# Altium PCB PCBGOST.PcbDoc (part 3 of 3)
Units mm, origin at the board's own origin, x right, y up, seen from the top; angles counter-clockwise.
Board outline 200 x 200 mm, 2 copper layers (Top Layer, Bottom Layer), stack 1.64 mm thick; 237 components, 177 nets, 928 pads, 315 vias.
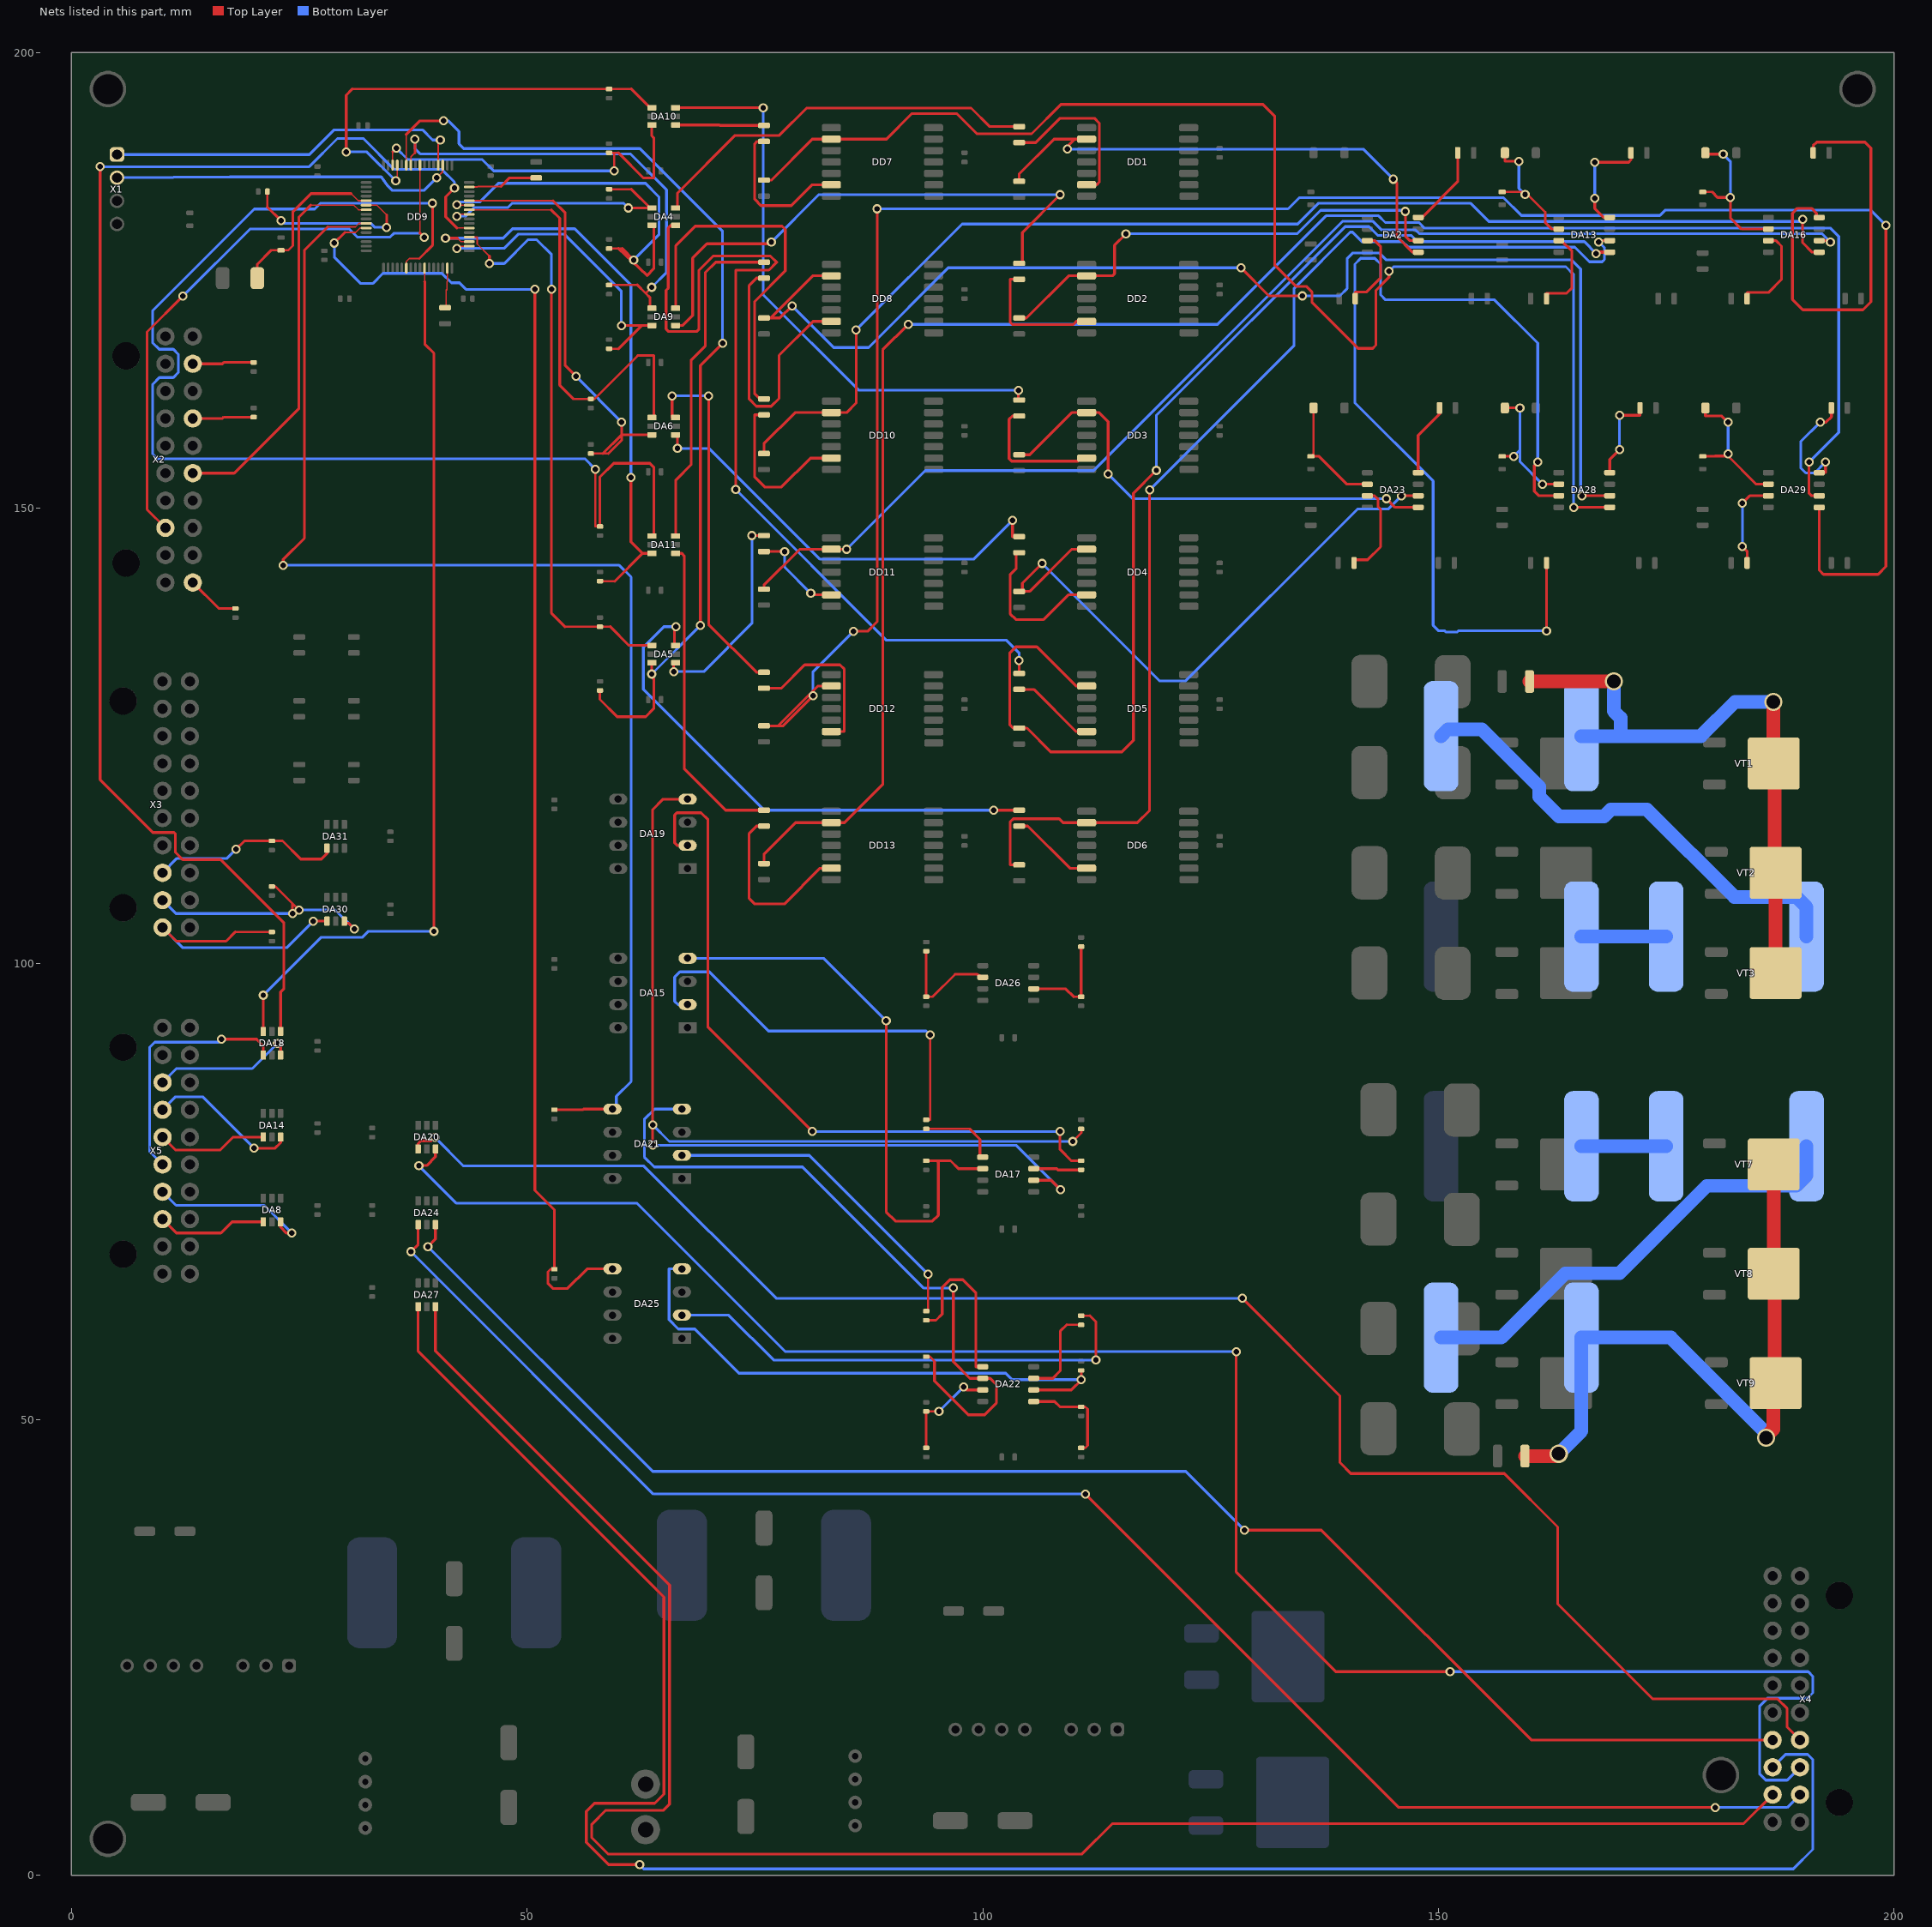
[diagram p3: the nets of this part, all layers, seen from the top]

## Via types
v1: diameter 1, hole 0.6, Top Layer to Bottom Layer, 272 vias
v2: diameter 2, hole 1.5, Top Layer to Bottom Layer, 41 vias
v3: diameter 0.5, hole 0.3, Top Layer to Bottom Layer, 2 vias

## Nets (pads, with @x,y where several pads share a name; then routed paths per layer and width w, separated by ;. In a path a pad name is that pad's centre, name@x,y a point inside that pad or via, vN(x,y) a via of type N, cw(c..) or ccw(c..) an arc to the next point about the centre after c; other vN are vias at no path point) (continued)
NetC35_1: C35.1 DA13.2 VD2.C | length 15.3
  Top Layer w0.25: C35.1@157,184.7 159.241,184.7 159.512,184.7 161.722,182.49
  Top Layer w0.3: VD2.C@157.3,189 157.3,188.062 v1(158.843,188.062) ; v1@159.241,184.7 v1(159.512,184.429) ; 161.722,182.49 161.722,181.356 162.443,180.635 DA13.2@163.206,180.635
  Bottom Layer w0.3: v1(158.843,188.062) 158.843,185.098 v1(159.512,184.429)
NetC41_1: C41.1 DA16.2 VD5.C | length 17.4
  Top Layer w0.25: C41.1@179,184.7 180.035,184.7
  Top Layer w0.3: VD5.C@179.3,189 179.3,188.849 v1(181.254,188.849) ; 180.035,184.7 180.636,184.099 v1(182.042,184.099) 182.042,181.864 183.271,180.635 DA16.2@186.206,180.635
  Bottom Layer w0.3: v1(181.254,188.849) 182.042,188.062 v1(182.042,184.099)
NetC42_1: C42.1 L3.2 VT1.D VT2.D VT3.D | length 68
  Top Layer w1.5: C42.1@160,131 v2(169.25,131) ; v2(186.75,128.75) 186.75,122.05 VT1.D@186.8,122 186.9,121.9 186.9,110.1 VT2.D@187,110 VT3.D@187,99
  Bottom Layer w1.5: L3.2@165.7,125 170,125 ; v2(169.25,131) 169.25,127.75 170,127 170,125 ; v2(186.75,128.75) 182.546,128.75 178.796,125 170,125
NetC45_1: C45.1 DA23.2 VD6.C | length 12.9
  Top Layer w0.25: VD6.C@136.3,161 136.3,156 C45.1@136,155.7 136.906,155.7
  Top Layer w0.3: 136.906,155.7 139.971,152.635 DA23.2@142.206,152.635
NetC47_1: C47.1 L6.2 VT7.D VT8.D VT9.D | length 73.2
  Top Layer w1.5: C47.1@159.5,46 162.815,46 163.065,46.25 v2(163.2,46.25) ; v2(185.95,48) 185.95,48.135 186.75,48.935 186.75,53.75 VT9.D@187,54 186.9,54.1 186.9,65.9 VT8.D@186.8,66 VT7.D@186.8,78
  Bottom Layer w1.5: v2(163.2,46.25) 165.7,48.75 L6.2@165.7,59 175.5,59 180.442,54.059 185.854,48.646 185.854,48.096 v2(185.95,48)
NetC48_1: C48.1 DA28.2 VD7.C | length 15.1
  Top Layer w0.25: C48.1@157,155.7 v1(158.267,155.7)
  Top Layer w0.3: VD7.C@157.3,161 157.3,161.011 v1(158.953,161.011) ; v1(161.436,152.635) DA28.2@163.206,152.635
  Bottom Layer w0.3: v1(158.267,155.7) 158.953,156.386 ; v1(158.953,161.011) 158.953,156.386 ; v1(161.436,152.635) 158.953,155.118 158.953,156.386
NetC51_1: C51.1 DA29.2 VD8.C | length 18.6
  Top Layer w0.25: v1@181.532,155.7 C51.1@179,155.7 181.66,155.828 184.853,152.635
  Top Layer w0.3: VD8.C@179.3,161 179.3,160.122 181.102,160.122 v1(181.788,159.436) ; v1@181.532,155.7 181.66,155.828 v1(181.788,155.956) ; 184.853,152.635 DA29.2@186.206,152.635
  Bottom Layer w0.3: v1(181.788,155.956) v1(181.788,159.436)
NetDA2_3: DA2.3 R40.2 | length 9.3
  Top Layer w0.3: R40.2@140.875,173 140.875,173.739 142.133,173.739 143.654,175.26 143.654,178.738 143.027,179.365 DA2.3@142.206,179.365
NetDA2_8: DA2.8 R41.2 | length 9.1
  Top Layer w0.3: DA2.8@147.794,181.905 148.198,181.905 152.125,185.832 R41.2@152.125,189
NetDA13_3: DA13.3 R46.2 | length 9.6
  Top Layer w0.3: R46.2@161.875,173 161.875,173.596 164.084,173.596 164.654,174.166 164.654,178.211 163.5,179.365 DA13.3@163.206,179.365
NetDA13_8: DA13.8 R47.2 | length 12
  Top Layer w0.3: v1(167.157,184.023) 167.157,182.896 168.148,181.905 DA13.8@168.794,181.905 ; v1(167.157,187.96) 170.871,187.96 171.125,188.214 R47.2@171.125,189
  Bottom Layer w0.3: v1(167.157,184.023) v1(167.157,187.96)
NetDA15_2: DA15.2 R50.1 | length 45.1
  Top Layer w0.25: R50.1@93.8,82.9 94.234,82.9 v1(94.234,92.202)
  Bottom Layer w0.3: DA15.2@67.62,95.54 66.548,95.54 66.192,95.896 66.192,98.552 66.777,99.136 70.002,99.136 76.495,92.643 93.793,92.643 v1(94.234,92.202)
NetDA15_4: DA15.4 DA17.2 R55.2 | length 64.6
  Top Layer w0.25: R55.2@93.8,78.4 94.945,78.4
  Top Layer w0.3: v1(89.408,93.751) 89.408,72.796 90.424,71.78 94.488,71.78 95.123,72.415 95.123,78.222 94.945,78.4 96.469,78.4 97.334,77.535 DA17.2@100.006,77.535
  Bottom Layer w0.3: DA15.4@67.62,100.62 82.539,100.62 v1(89.408,93.751)
NetDA16_3: DA16.3 R51.2 | length 10.4
  Top Layer w0.3: R51.2@183.875,173 183.875,173.669 186.215,173.669 187.654,175.108 187.654,178.757 187.046,179.365 DA16.3@186.206,179.365
NetDA16_8: DA16.8 R53.2 | length 47.2
  Top Layer w0.3: R53.2@191.125,189 191.125,189.779 191.516,190.17 196.799,190.17 197.46,189.509 197.46,172.644 196.596,171.78 189.992,171.78 188.854,172.918 188.854,182.372 189.387,182.905 190.957,182.905 191.491,182.372 191.491,181.905 DA16.8@191.794,181.905
NetDA17_1: DA17.1 R50.2 | length 8.6
  Top Layer w0.25: R50.2@93.8,81.9 98.552,81.9
  Top Layer w0.3: 98.552,81.9 99.695,80.757 99.695,78.805 DA17.1@100.006,78.805
NetDA17_6: DA17.6 DA19.4 R64.2 | length 139.9
  Top Layer w0.25: v1(109.88,80.518) 110.82,81.458 R64.2@110.8,81.9
  Top Layer w0.3: v1(63.779,80.112) v1(63.779,82.347) 63.779,116.937 64.922,118.08 DA19.4@67.62,118.08 ; DA17.6@105.594,76.265 107.504,76.265 v1(108.534,75.235)
  Bottom Layer w0.3: v1(63.779,80.112) 103.657,80.112 v1(108.534,75.235) ; v1(63.779,82.347) 65.608,80.518 v1(109.88,80.518)
NetDA17_7: DA17.7 R57.2 | length 5.3
  Top Layer w0.3: DA17.7@105.594,77.535 108.128,77.535 108.263,77.4 R57.2@110.8,77.4
NetDA19_2: DA19.2 R57.1 | length 79.6
  Top Layer w0.25: 109.728,78.4 R57.1@110.8,78.4
  Top Layer w0.3: DA19.2@67.62,113 66.476,113 66.192,113.284 66.192,116.332 66.446,116.586 69.088,116.586 69.85,115.824 69.85,93.066 v1(81.305,81.61) ; v1(108.483,81.61) 108.483,79.645 109.728,78.4
  Bottom Layer w0.3: v1(81.305,81.61) v1(108.483,81.61)
NetDA21_2: DA21.2 R67.1 | length 36.7
  Top Layer w0.25: R67.1@93.8,61.9 94.005,61.9 v1(94.005,65.964)
  Bottom Layer w0.3: DA21.2@67,79 80.969,79 v1(94.005,65.964)
NetDA21_4: DA21.4 DA22.2 R70.2 | length 76.6
  Top Layer w0.25: R70.2@93.8,56.9 94.205,56.9 94.713,56.392
  Top Layer w0.3: 94.713,56.392 94.713,54.233 98.425,50.521 100.203,50.521 101.498,51.816 101.498,53.848 100.811,54.535 DA22.2@100.006,54.535 98.59,54.535 96.774,56.351 v1(96.774,64.44)
  Bottom Layer w0.3: DA21.4@67,84.08 64.008,84.08 62.865,82.937 62.865,78.816 63.957,77.724 80.213,77.724 93.497,64.44 v1(96.774,64.44)
NetDA22_1: DA22.1 R67.2 | length 18.5
  Top Layer w0.25: R67.2@93.8,60.9 94.869,60.9
  Top Layer w0.3: 94.869,60.9 95.555,61.586 95.555,64.516 96.393,65.354 97.815,65.354 99.237,63.933 99.237,55.805 DA22.1@100.006,55.805
NetDA22_3: DA22.3 R65.1 R69.1 | length 11.5
  Top Layer w0.25: R69.1@93.8,50.9 v1(95.198,50.9)
  Top Layer w0.3: R65.1@93.8,46.9 R69.1@93.8,50.9 ; v1(97.892,53.594) 98.221,53.265 DA22.3@100.006,53.265
  Bottom Layer w0.3: v1(95.198,50.9) v1(97.892,53.594)
NetDA22_5: DA22.5 R74.1 R76.1 | length 11.1
  Top Layer w0.25: R76.1@110.8,46.9 111.252,46.9 111.506,47.154 ; R74.1@110.8,51.4 111.252,51.4 111.506,51.146
  Top Layer w0.3: DA22.5@105.594,51.995 107.899,51.995 108.494,51.4 R74.1@110.8,51.4 ; 111.506,47.154 111.506,51.146
NetDA22_6: DA22.6 DA25.4 R78.2 | length 62.7
  Top Layer w0.25: v1(110.8,54.381) R78.2@110.8,55.4 110.82,55.4 v1@110.82,54.357
  Top Layer w0.3: DA22.6@105.594,53.265 109.728,53.265 v1@110.82,54.357
  Bottom Layer w0.3: DA25.4@67,66.54 65.583,66.54 65.583,60.96 66.599,59.944 68.402,59.944 73.254,55.093 102.514,55.093 103.226,54.381 v1(110.8,54.381)
NetDA22_7: DA22.7 R75.2 | length 10.2
  Top Layer w0.25: 109.22,60.4 R75.2@110.8,60.4
  Top Layer w0.3: DA22.7@105.594,54.535 107.696,54.535 108.509,55.348 108.509,59.689 109.22,60.4
NetDA23_3: DA23.3 R68.2 | length 10.5
  Top Layer w0.3: R68.2@140.75,144 140.75,144.348 142.24,144.348 143.662,145.771 143.662,149.881 143.393,150.15 143.393,150.974 143.002,151.365 DA23.3@142.206,151.365
NetDA23_8: DA23.8 R71.2 | length 8.1
  Top Layer w0.3: DA23.8@147.794,153.905 147.777,153.905 147.777,157.988 150.125,160.336 R71.2@150.125,161
NetDA25_2: DA25.2 R75.1 | length 53.6
  Top Layer w0.25: R75.1@110.8,61.4 111.76,61.4
  Top Layer w0.3: 111.76,61.4 112.42,60.74 v1(112.42,56.54)
  Bottom Layer w0.3: DA25.2@67,61.46 72.136,61.46 77.056,56.54 v1(112.42,56.54)
NetDA26_2: DA26.2 R80.2 R82.2 | length 12.3
  Top Layer w0.25: R82.2@93.8,96.4 94.488,96.4 96.97,98.882
  Top Layer w0.3: R82.2@93.8,96.4 R80.2@93.8,101.4 ; 96.97,98.882 99.348,98.882 DA26.2@100.006,98.535
NetDA26_6: DA26.6 R92.2 R94.2 | length 11.1
  Top Layer w0.25: 109.983,96.4 R94.2@110.8,96.4
  Top Layer w0.3: DA26.6@105.594,97.265 109.118,97.265 109.983,96.4 ; R94.2@110.8,96.4 R92.2@110.8,101.9
NetDA28_3: DA28.3 R81.2 | length 108.9
  Top Layer w0.3: v1(160.909,155.067) 160.528,154.686 160.528,151.873 161.036,151.365 DA28.3@163.206,151.365 ; v1(161.874,136.55) R81.2@161.875,144
  Bottom Layer w0.3: v1(160.909,155.067) 160.909,168.123 156.159,172.872 144.196,172.872 143.662,173.406 143.662,176.784 143.027,177.419 141.478,177.419 140.843,176.784 140.843,161.569 149.428,152.984 149.428,137.16 150.038,136.55 150.713,136.55 150.862,136.402 152.025,136.402 152.174,136.55 v1(161.874,136.55)
NetDA28_8: DA28.8 R88.2 | length 9.8
  Top Layer w0.3: DA28.8@168.794,153.905 168.808,153.905 168.808,155.372 v1(169.875,156.439) ; v1(169.875,160.198) 172.125,160.198 R88.2@172.125,161
  Bottom Layer w0.3: v1(169.875,156.439) v1(169.875,160.198)
NetDA29_3: DA29.3 R100.2 | length 10
  Top Layer w0.3: v1(183.363,145.8) 183.875,145.288 R100.2@183.875,144 ; v1(183.363,150.571) 184.156,151.365 DA29.3@186.206,151.365
  Bottom Layer w0.3: v1(183.363,145.8) v1(183.363,150.571)
NetDA29_8: DA29.8 R102.2 | length 13.6
  Top Layer w0.3: DA29.8@191.794,153.905 192.481,153.905 v1(192.481,155.067) ; v1(191.897,159.436) 192.541,159.436 193.125,160.02 R102.2@193.125,161
  Bottom Layer w0.3: v1(191.897,159.436) 189.763,157.302 189.763,154.432 190.322,153.873 191.287,153.873 v1(192.481,155.067)
NetDD1_6: DD1.6 R5.1 | length 18.1
  Top Layer w0.3: R5.1@104,190.125 105.816,190.125 108.477,192.786 112.268,192.786 112.801,192.253 112.801,185.779 112.522,185.5 DD1.6@111.4,185.5
NetDD2_6: DD2.6 R6.1 | length 14.4
  Top Layer w0.3: R6.1@104,175.125 102.997,175.125 102.997,170.434 103.276,170.155 109.941,170.155 110.287,170.5 DD2.6@111.4,170.5
NetDD3_6: DD3.6 R7.1 | length 14.3
  Top Layer w0.3: R7.1@104,160.125 103.254,160.125 102.895,159.766 102.895,155.448 103.175,155.169 110.413,155.169 110.744,155.5 DD3.6@111.4,155.5
NetDD4_6: DD4.6 R8.1 | length 17.1
  Top Layer w0.3: R8.1@104,145.125 103.657,145.125 103.657,143.358 102.997,142.697 102.997,138.43 103.632,137.795 106.693,137.795 109.398,140.5 DD4.6@111.4,140.5
NetDD5_6: DD5.6 R18.1 | length 9.3
  Top Layer w0.3: R18.1@104,130.125 105.611,130.125 110.236,125.5 DD5.6@111.4,125.5
NetDD6_6: DD6.6 R19.1 | length 9.3
  Top Layer w0.3: R19.1@104,115.125 104.941,115.125 109.566,110.5 DD6.6@111.4,110.5
NetDD7_6: DD7.6 R20.1 | length 16.9
  Top Layer w0.3: R20.1@76,190.25 75.239,190.25 74.981,189.992 74.981,183.896 75.667,183.21 78.99,183.21 81.28,185.5 DD7.6@83.4,185.5
NetDD8_6: DD8.6 R21.1 | length 30.4
  Top Layer w0.3: R21.1@76,175.25 75.184,175.25 74.371,174.437 74.371,161.976 75.159,161.188 76.784,161.188 77.648,162.052 77.648,166.768 81.38,170.5 DD8.6@83.4,170.5
NetDD10_6: DD10.6 R32.1 | length 18
  Top Layer w0.3: R32.1@76,160.25 74.981,160.25 74.981,153.416 76.073,152.324 77.926,152.324 81.102,155.5 DD10.6@83.4,155.5
NetDD11_6: DD11.6 R33.1 | length 10.4
  Top Layer w0.3: R33.1@76,145.25 v1(78.267,145.25) ; v1(81.128,140.665) 81.293,140.5 DD11.6@83.4,140.5
  Bottom Layer w0.3: v1(78.267,145.25) 78.267,143.526 v1(81.128,140.665)
NetDD12_6: DD12.6 R34.1 | length 18.3
  Top Layer w0.3: R34.1@76,130.25 77.902,130.25 80.468,132.817 84.328,132.817 84.811,132.334 84.811,125.5 DD12.6@83.4,125.5
NetDD13_6: DD13.6 R35.1 | length 20
  Top Layer w0.3: R35.1@76,115.125 75.184,115.125 74.371,114.312 74.371,107.188 74.981,106.578 78.232,106.578 82.154,110.5 DD13.6@83.4,110.5
NetL3_1: L3.1 L4.1 | length 53
  Bottom Layer w1.5: L3.1@150.3,125 151.05,125.75 154.75,125.75 161.05,119.45 161.05,118.367 163.217,116.2 168.183,116.2 168.946,116.963 172.871,116.963 182.484,107.35 189.265,107.35 190.4,106.215 L4.1@190.4,103
NetL4_2: L4.2 L5.2 | length 9.3
  Bottom Layer w1.5: L5.2@165.7,103 L4.2@175,103
NetL6_1: L6.1 L7.1 | length 50.7
  Bottom Layer w1.5: L6.1@150.3,59 156.887,59 163.941,66.054 169.867,66.054 179.463,75.65 189.265,75.65 190.4,76.785 L7.1@190.4,80
NetL7_2: L7.2 L8.2 | length 9.3
  Bottom Layer w1.5: L8.2@165.7,80 L7.2@175,80
NetR39_2: R39.2 X2.11 | length 5.9
  Top Layer w0.25: 16.17,139 R39.2@18,139
  Top Layer w0.3: X2.11@13.32,141.85 16.17,139
NetR43_2: R43.2 X2.17 | length 6.7
  Top Layer w0.3: X2.17@13.32,159.85 16.561,159.85 16.711,160 R43.2@20,160
NetR44_2: R44.2 X2.19 | length 6.7
  Top Layer w0.3: X2.19@13.32,165.85 16.561,165.85 16.711,166 R44.2@20,166
nJTRST: DD9.56 X2.3 | length 66.2
  Top Layer w0.15: 38.25,180.19 DD9.56@38.25,187.65
  Top Layer w0.3: X2.3@10.32,147.85 8.306,149.864 8.306,169.348 v1(12.237,173.279) ; 38.25,180.19 v1(38.71,179.73)
  Bottom Layer w0.3: v1(12.237,173.279) 19.599,180.641 30.481,180.641 31.372,179.75 34.954,179.75 35.368,180.164 38.276,180.164 v1(38.71,179.73)
nRSTIN: DD9.7 X2.15 | length 43.7
  Top Layer w0.15: 26.262,183.252 30.988,183.252 31.49,182.75 DD9.7@32.35,182.75
  Top Layer w0.3: X2.15@13.32,153.85 17.858,153.85 24.965,160.957 24.965,181.955 26.262,183.252
OG1_1: DA2.5 DD1.2 R1.1 | length 57.9
  Top Layer w0.3: R1.1@104,185.875 103.988,185.875 103.988,186.665 107.823,190.5 110.109,190.5 ; v1(109.296,189.408) 109.296,189.687 110.109,190.5 ; DD1.2@111.4,190.5 110.109,190.5 ; v1(145.059,186.106) 145.454,185.711 145.454,179.809 147.168,178.095 DA2.5@147.794,178.095
  Bottom Layer w0.3: v1(109.296,189.408) 141.757,189.408 v1(145.059,186.106)
OG1_2: DA23.5 DD3.2 R3.1 | length 53.4
  Top Layer w0.3: R3.1@104,155.875 105.156,155.875 109.781,160.5 DD3.2@111.4,160.5 112.776,160.5 113.767,159.509 v1(113.767,153.746) ; v1(144.297,151.054) 145.256,150.095 DA23.5@147.794,150.095
  Bottom Layer w0.3: v1(113.767,153.746) 116.459,151.054 v1(144.297,151.054)
OG2_1: DA13.5 DD5.2 R12.1 | length 130
  Top Layer w0.3: DD5.2@111.4,130.5 110.236,130.5 105.938,134.798 103.632,134.798 102.972,134.137 102.972,126.238 103.335,125.875 R12.1@104,125.875 104.851,125.875 107.46,123.266 115.265,123.266 116.535,124.536 116.535,151.638 v1(119.05,154.153)
  Top Layer w0.4: v1(167.32,177.952) 167.462,178.095 DA13.5@168.794,178.095
  Bottom Layer w0.3: v1(119.05,154.153) 119.05,160.172 139.772,180.895 142.392,180.895 143.353,179.934 147.041,179.934 147.726,179.248 166.024,179.248 v1(167.32,177.952)
OG2_2: DA28.5 DD7.2 R14.1 | length 152.9
  Top Layer w0.3: R14.1@76,186 76.805,186 81.305,190.5 DD7.2@83.4,190.5 89.433,190.5 92.24,193.307 97.13,193.307 99.352,191.084 105.359,191.084 108.585,194.31 130.759,194.31 132.029,193.04 132.029,176.708 134.387,174.35 135.507,174.35 136.121,173.736 136.121,172.616 141.199,167.538 142.788,167.538 143.144,167.894 143.144,173.901 144.577,175.334 v1(144.577,175.997) ; v1(164.846,150.095) DA28.5@168.794,150.095
  Bottom Layer w0.3: v1(144.577,175.997) 145.085,176.505 163.982,176.505 164.846,175.641 v1(164.846,150.095)
OG3_1: DA16.5 DD10.2 R27.1 | length 136.4
  Top Layer w0.3: R27.1@76,156 75.997,156 75.997,157.099 79.398,160.5 DD10.2@83.4,160.5 85.062,160.5 86.106,161.544 v1(86.106,169.545) ; v1(189.967,181.686) 189.967,179.136 191.008,178.095 DA16.5@191.794,178.095
  Bottom Layer w0.3: v1(86.106,169.545) 97.739,181.178 134.569,181.178 136.87,183.479 153.503,183.479 155.524,181.458 189.738,181.458 v1(189.967,181.686)
OG3_2: DA29.5 DD12.2 R29.1 | length 236.8
  Top Layer w0.3: R29.1@76,126.125 77.56,126.125 ; v1(81.382,129.413) 78.094,126.125 77.56,126.125 ; DD12.2@83.4,130.5 81.935,130.5 77.56,126.125 ; v1(85.801,136.5) 87.376,136.5 88.417,137.541 v1(88.417,182.855) ; DA29.5@191.794,150.095 191.794,143.205 192.251,142.748 198.247,142.748 199.111,143.612 v1(199.111,181.051)
  Bottom Layer w0.3: v1(81.382,129.413) 81.382,132.08 v1(85.801,136.5) ; v1(88.417,182.855) 133.512,182.855 134.736,184.079 157.152,184.079 159.1,182.131 174.296,182.131 174.872,182.707 197.455,182.707 v1(199.111,181.051)
OG4_1: DA2.6 DD2.2 R2.1 | length 53.5
  Top Layer w0.3: R2.1@104,170.875 104.8,170.875 109.425,175.5 DD2.2@111.4,175.5 114.224,175.5 114.466,175.742 114.466,178.86 v1(115.717,180.111) ; v1(146.38,182.575) 146.38,179.857 146.873,179.365 DA2.6@147.794,179.365
  Bottom Layer w0.3: v1(115.717,180.111) 134.489,180.111 137.072,182.695 146.261,182.695 v1(146.38,182.575)
OG4_2: DA23.6 DD4.2 R4.1 | length 68.3
  Top Layer w0.3: R4.1@104,140.875 R4.1@104.343,140.875 ; v1(106.502,143.942) 104.343,141.783 R4.1@104.343,140.875 ; DD4.2@111.4,145.5 109.762,145.5 105.137,140.875 R4.1@104.343,140.875 ; v1(145.948,151.365) DA23.6@147.794,151.365
  Bottom Layer w0.3: v1(106.502,143.942) 119.38,131.064 122.276,131.064 141.122,149.911 144.494,149.911 v1(145.948,151.365)
OG5_1: DA13.6 DD6.2 R13.1 | length 127.3
  Top Layer w0.3: R13.1@104,110.875 102.997,110.875 102.997,115.57 103.353,115.926 108.388,115.926 108.814,115.5 DD6.2@111.4,115.5 116.973,115.5 118.313,116.84 v1(118.313,152.019) ; v1(167.589,179.222) 167.732,179.365 DA13.6@168.794,179.365
  Bottom Layer w0.3: v1(118.313,152.019) 134.168,167.874 134.168,174.137 140.325,180.295 140.573,180.295 141.61,179.258 146.062,179.258 146.682,178.638 164.973,178.638 166.573,177.038 167.97,177.038 168.224,177.292 168.224,178.587 v1(167.589,179.222)
OG5_2: DA28.6 DD8.2 R15.1 | length 138.1
  Top Layer w0.3: R15.1@76,170.875 76.717,170.875 ; v1(79.07,172.212) 77.733,170.875 76.717,170.875 ; DD8.2@83.4,175.5 81.342,175.5 76.717,170.875 ; v1(128.346,176.378) 131.42,173.304 v1(135.077,173.304) ; v1(165.76,151.365) DA28.6@168.794,151.365
  Bottom Layer w0.3: v1(79.07,172.212) 83.642,167.64 87.482,167.64 96.22,176.378 v1(128.346,176.378) ; v1(135.077,173.304) 139.192,173.304 139.979,174.092 139.979,177.384 140.614,178.019 143.494,178.019 144.247,177.267 164.582,177.267 165.608,176.24 165.608,151.517 v1(165.76,151.365)
OG6_1: DA16.6 DD11.2 R28.1 | length 136.2
  Top Layer w0.3: R28.1@76,141.125 75.997,141.125 75.997,141.569 79.928,145.5 DD11.2@83.4,145.5 v1(85.065,145.5) ; DA16.6@191.794,179.365 192.872,179.365 v1(193.015,179.222)
  Bottom Layer w0.3: v1(85.065,145.5) 93.692,154.127 112.156,154.127 139.523,181.495 142.803,181.495 143.764,180.534 147.497,180.534 147.904,180.126 192.111,180.126 v1(193.015,179.222)
OG6_2: DA29.6 DD13.2 R30.1 | length 207.6
  Top Layer w0.3: R30.1@76,111 75.997,111 75.997,112.039 79.457,115.5 DD13.2@83.4,115.5 84.836,115.5 89.027,119.691 89.027,167.386 v1(91.821,170.18) ; v1(190.678,155.067) 190.678,151.638 190.951,151.365 DA29.6@191.794,151.365
  Bottom Layer w0.3: v1(91.821,170.18) 125.758,170.18 137.672,182.095 143.432,182.095 144.177,181.35 147.878,181.35 148.501,180.726 193.035,180.726 193.929,179.832 193.929,158.318 v1(190.678,155.067)
OSC_IN: C11.1 DD9.5 ZQ1.1 | length 19.2
  Top Layer w0.15: 30.69,184.531 31.471,183.75 DD9.5@32.35,183.75
  Top Layer w0.25: 21.916,178.3 C11.1@23,178.3 23.792,178.3 24.308,178.816
  Top Layer w0.3: ZQ1.1@20.4,175.25 20.4,176.784 21.916,178.3 ; 24.308,178.816 24.308,182.55 26.289,184.531 30.69,184.531
OSC_OUT: DD9.6 R37.2 | length 19.8
  Top Layer w0.15: DD9.6@32.35,183.25 33.528,183.25 34.595,182.183
  Top Layer w0.25: 21.5,183.046 R37.2@21.5,184.75
  Top Layer w0.3: 21.5,183.046 v1(22.987,181.559) ; v1(34.595,180.823) 34.595,182.183
  Bottom Layer w0.3: v1(22.987,181.559) 23.305,181.241 32.881,181.241 33.299,180.823 v1(34.595,180.823)
R1: DA18.6 DD9.26 | length 98.8
  Top Layer w0.15: 38.75,174.864 DD9.26@38.75,176.35
  Top Layer w0.3: DA18.6@21.05,92.6 21.05,96.564 v1(21.057,96.571) ; 38.75,174.864 38.775,174.839 38.775,168.006 39.776,167.005 v1(39.776,103.581)
  Bottom Layer w0.3: v1(21.057,96.571) 27.417,102.931 31.943,102.931 32.593,103.581 v1(39.776,103.581)
R2: DA18.4 DD9.38 | length 156.6
  Top Layer w0.15: 42.287,180.75 DD9.38@43.65,180.75
  Top Layer w0.3: v1(3.15,187.477) 3.15,120.218 8.941,114.427 11.252,114.427 11.405,114.275 11.405,112.243 12.192,111.455 16.358,111.455 23.317,104.496 23.317,97.282 22.95,96.915 DA18.4@22.95,92.6 ; v1(42.037,185.141) 41.072,184.175 41.072,181.966 42.287,180.75
  Bottom Layer w0.3: v1(3.15,187.477) 26.096,187.477 29.187,190.568 32.047,190.568 35.443,187.173 40.64,187.173 42.037,185.776 v1(42.037,185.141)
U1: DA21.5 DD9.10 R72.1 | length 148.1
  Top Layer w0.15: 28.13,180.873 31.166,180.873 31.542,181.25 DD9.10@32.35,181.25
  Top Layer w0.3: v1(23.241,143.744) 23.241,144.386 25.565,146.71 25.565,178.308 28.13,180.873 ; R72.1@53,84 56.134,84 56.214,84.08 DA21.5@59.38,84.08
  Bottom Layer w0.3: v1(23.241,143.744) 60.117,143.744 61.417,142.443 61.417,87.097 59.792,85.471 59.792,84.08 DA21.5@59.38,84.08
U2: DA25.5 DD9.11 R77.1 | length 148.8
  Top Layer w0.15: 30.023,180.264 31.193,180.264 31.679,180.75 DD9.11@32.35,180.75
  Top Layer w0.25: 52.299,66.221 52.578,66.5 R77.1@53,66.5 53,73.009
  Top Layer w0.3: v1(28.854,179.095) 30.023,180.264 ; v1(50.851,174.021) 50.851,75.159 53,73.009 ; 52.299,66.221 52.299,64.922 52.832,64.389 54.432,64.389 56.583,66.54 DA25.5@59.38,66.54
  Bottom Layer w0.3: v1(28.854,179.095) 28.854,177.548 31.748,174.655 33.059,174.655 34.177,175.773 40.662,175.773 41.705,174.731 42.583,174.731 43.293,174.021 v1(50.851,174.021)
UART_RX: DD9.52 X1.1 | length 39.9
  Top Layer w0.15: DD9.52@40.25,187.65 v1@40.25,190.161
  Top Layer w0.3: v1@40.25,190.161 v1(40.488,190.398)
  Bottom Layer w0.3: X1.1@5,188.81 26.115,188.81 28.827,191.521 38.514,191.521 39.637,190.398 v1(40.488,190.398)
UART_TX: DD9.51 X1.2 | length 38
  Top Layer w0.15: v1(40.081,186.258) 40.75,186.927 DD9.51@40.75,187.65
  Bottom Layer w0.3: X1.2@5,186.27 17.392,186.366 33.987,186.366 34.675,185.42 35.23,184.865 38.688,184.865 v1(40.081,186.258)
UPR1_1: DA4.1 DD9.41 R9.1 | length 29
  Top Layer w0.15: v1(42.291,182.042) 42.499,182.25 DD9.41@43.65,182.25
  Top Layer w0.25: R9.1@59,185 61.45,185
  Top Layer w0.3: v1(61.119,182.95) DA4.1@63.5,182.95 ; 61.45,185 DA4.1@63.5,182.95 ; DA4.1@63.7,182.95 DA4.1@63.5,182.95
  Bottom Layer w0.3: v1(42.291,182.042) 43.231,182.042 44.171,182.982 47.874,182.982 48.362,183.47 60.599,183.47 v1(61.119,182.95)
UPR1_2: DA10.1 DD9.61 R23.1 | length 49.4
  Top Layer w0.15: v1@35.75,186.105 DD9.61@35.75,187.65
  Top Layer w0.25: 30.824,196 R23.1@59,196 61.45,196
  Top Layer w0.3: v1(30.15,189.103) 30.15,195.326 30.824,196 ; v1(35.585,185.94) v1@35.75,186.105 ; 61.45,196 63.5,193.95 DA10.1@63.7,193.95
  Bottom Layer w0.3: v1(30.15,189.103) 32.423,189.103 v1(35.585,185.94)
UPR1A_1: DA4.6 R5.2 | length 44
  Top Layer w0.3: DA4.6@66.3,182.95 66.497,182.95 66.497,184.582 72.822,190.906 77.673,190.906 80.673,193.907 98.73,193.907 100.762,191.875 R5.2@104,191.875
UPR1A_2: DA10.6 R7.2 | length 63.6
  Top Layer w0.3: DA10.6@66.3,193.95 v1(75.906,193.95) ; v1(103.911,162.941) 103.911,161.875 R7.2@104,161.875
  Bottom Layer w0.3: v1(75.906,193.95) 75.906,173.446 86.411,162.941 v1(103.911,162.941)
UPR2_1: DA4.3 DD9.43 R10.1 | length 46.8
  Top Layer w0.15: v1@42.353,183.25 DD9.43@43.65,183.25
  Top Layer w0.25: R10.1@59,178.5 60.031,178.5 60.438,178.5
  Top Layer w0.3: v1(42.291,183.312) v1@42.353,183.25 ; 60.031,178.5 61.541,177.076 63.17,175.539 63.906,176.276 63.906,181.05 DA4.3@63.7,181.05 ; 60.438,178.5 v1(61.697,177.241)
  Bottom Layer w0.3: v1(42.291,183.312) 42.596,183.617 44.831,183.617 46.863,185.649 62.992,185.649 64.465,184.175 64.465,180.01 v1(61.697,177.241)
UPR2_2: DA10.3 DD9.62 R24.1 | length 40.9
  Top Layer w0.15: DD9.62@35.25,187.65 35.25,189.098
  Top Layer w0.25: R24.1@59,189 59.563,189 ; v1(59.563,187.02) 59.563,189 ; 60.022,189 59.563,189
  Top Layer w0.3: 35.25,189.098 v1(35.662,189.509) ; 60.022,189 62.789,186.233 63.906,186.233 63.906,190.652 63.678,190.881 63.678,192.05 DA10.3@63.7,192.05
  Bottom Layer w0.3: v1(35.662,189.509) 36.904,188.267 45.08,188.267 46.327,187.02 v1(59.563,187.02)
UPR2A_1: DA4.4 R18.2 | length 101.6
  Top Layer w0.3: DA4.4@66.3,181.05 65.786,181.05 65.481,180.745 65.481,174.142 65.253,173.914 65.253,169.672 65.532,169.393 68.589,169.393 68.859,169.663 68.859,176.124 70.409,177.673 76.708,177.673 77.394,176.987 76.53,176.124 72.923,176.124 72.898,176.098 v1(72.898,152.044) ; v1(103.988,133.274) 104,133.261 R18.2@104,131.875
  Bottom Layer w0.3: v1(72.898,152.044) 89.433,135.509 102.616,135.509 103.988,134.137 v1(103.988,133.274)
UPR2A_2: DA10.4 R20.2 | length 9.7
  Top Layer w0.3: DA10.4@66.3,192.05 71.12,192.05 71.17,192 R20.2@76,192
UPR3_1: DA9.1 DD9.58 R11.1 | length 52.3
  Top Layer w0.15: DD9.58@37.25,187.65 37.25,188.558 37.694,189.001
  Top Layer w0.25: R11.1@59,174.5 62.103,174.5
  Top Layer w0.3: 37.694,189.001 v1(37.694,190.5) ; 62.103,174.5 63.018,173.585 ; v1(63.678,174.244) 63.018,173.585 ; DA9.1@63.7,171.95 63.5,171.95 63.5,173.103 63.018,173.585
  Bottom Layer w0.3: v1(37.694,190.5) 37.694,189.484 38.311,188.867 61.374,188.867 65.303,184.937 65.303,175.87 v1(63.678,174.244)
UPR3_2: DA6.1 DD9.42 R25.1 | length 48.6
  Top Layer w0.15: DD9.42@43.65,182.75 52.656,182.75
  Top Layer w0.25: 55.091,162 R25.1@57,162 57.404,162 62.155,166.751
  Top Layer w0.3: 52.656,182.75 53.584,181.822 53.584,163.507 55.091,162 ; 62.155,166.751 63.906,166.751 63.906,159.95 DA6.1@63.7,159.95
UPR3A_1: DA9.6 R32.2 | length 40.6
  Top Layer w0.3: DA9.6@66.3,171.95 66.319,171.95 66.319,178.816 68.453,180.95 77.978,180.95 78.334,180.594 78.334,176.047 74.981,172.695 74.981,162.559 75.54,162 R32.2@76,162
UPR3A_2: DA6.6 R34.2 | length 40.1
  Top Layer w0.3: v1(65.913,162.331) 65.913,159.95 DA6.6@66.3,159.95 ; v1(69.926,162.331) 69.926,137.258 75.184,132 R34.2@76,132
  Bottom Layer w0.3: v1(65.913,162.331) v1(69.926,162.331)
UPR4_1: DA9.3 DD9.34 R16.1 | length 34.5
  Top Layer w0.15: v1(42.291,178.511) 42.53,178.75 DD9.34@43.65,178.75
  Top Layer w0.25: R16.1@59,167.5 60.02,167.5
  Top Layer w0.3: 60.02,167.5 62.57,170.05 ; v1(60.35,170.05) 62.57,170.05 ; DA9.3@63.7,170.05 62.57,170.05
  Bottom Layer w0.3: v1(42.291,178.511) 47.462,178.511 49.017,180.066 54.097,180.066 60.35,173.812 v1(60.35,170.05)
UPR4_2: DA6.3 DD9.44 R26.1 | length 48.8
  Top Layer w0.15: DD9.44@43.65,183.75 52.849,183.75
  Top Layer w0.25: R26.1@57,156 58.318,156 58.928,156
  Top Layer w0.3: 52.849,183.75 54.184,182.415 54.184,165.653 v1(55.372,164.465) ; 58.318,156 60.368,158.05 60.376,158.05 ; 58.928,156 60.376,157.448 60.376,158.05 ; v1(60.376,159.461) 60.376,158.05 ; DA6.3@63.7,158.05 60.376,158.05
  Bottom Layer w0.3: v1(55.372,164.465) v1(60.376,159.461)
UPR4A_1: DA9.4 R6.2 | length 61.6
  Top Layer w0.3: DA9.4@66.3,170.05 67.056,170.05 68.174,171.168 68.174,177.451 69.742,179.019 76.81,179.019 v1(76.81,179.222) ; R6.2@104,176.875 104.343,176.875 104.343,180.238 v1(108.509,184.404)
  Bottom Layer w0.3: v1(76.81,179.222) 81.991,184.404 v1(108.509,184.404)
UPR4A_2: DA6.4 R8.2 | length 47.8
  Top Layer w0.3: DA6.4@66.3,158.05 66.497,158.05 v1(66.497,156.566) ; v1(103.276,148.666) 103.276,146.875 R8.2@104,146.875
  Bottom Layer w0.3: v1(66.497,156.566) 69.967,156.566 82.109,144.424 99.035,144.424 v1(103.276,148.666)
UPR5_1: DA5.1 DD9.36 R17.1 | length 64.7
  Top Layer w0.15: DD9.36@43.65,179.75 44.526,179.75 44.526,178.994 45.872,177.648
  Top Layer w0.25: 54.153,137 R17.1@58,137 59.131,137
  Top Layer w0.3: v1(45.872,176.86) 45.872,177.648 ; v1(52.68,174.015) 52.68,138.473 54.153,137 ; 59.131,137 61.181,134.95 DA5.1@63.7,134.95
  Bottom Layer w0.3: v1(45.872,176.86) 47.498,176.86 50.104,179.466 51.054,179.466 52.68,177.84 v1(52.68,174.015)
UPR5_2: DA11.1 DD9.22 R31.1 | length 140.4
  Top Layer w0.15: DD9.22@36.75,176.35 36.75,177.06 37.084,177.394 38.176,177.394
  Top Layer w0.25: v1(57.506,154.28) 57.506,148 R31.1@57.988,148 ; 57.988,153.416 R31.1@57.988,148 ; R31.1@58,148 R31.1@57.988,148
  Top Layer w0.3: 38.176,177.394 39.624,178.841 v1(39.624,183.464) ; 57.988,153.416 59.51,154.938 63.477,154.938 63.906,154.508 63.906,146.95 DA11.1@63.7,146.95
  Bottom Layer w0.3: v1(39.624,183.464) 27.33,183.464 26.695,182.829 20.066,182.829 8.916,171.679 8.916,168.148 9.627,167.437 11.176,167.437 11.735,166.878 11.735,164.897 11.176,164.338 9.652,164.338 8.915,163.601 8.915,155.956 9.449,155.423 56.363,155.423 v1(57.506,154.28)
UPR5A_1: DA5.6 R19.2 | length 58.1
  Top Layer w0.3: DA5.6@66.3,134.95 66.167,134.95 66.167,136.83 v1(66.345,137.008) ; v1(101.194,116.875) R19.2@104,116.875
  Bottom Layer w0.3: v1(66.345,137.008) 65.024,137.008 62.763,134.747 62.763,130.124 76.013,116.875 v1(101.194,116.875)
UPR5A_2: DA11.6 R21.2 | length 37.2
  Top Layer w0.3: DA11.6@66.3,146.95 66.319,146.95 66.319,153.111 68.021,154.813 68.021,166.268 69.545,167.792 69.545,175.844 70.701,177 R21.2@76,177
UPR6_1: DA5.3 DD9.59 R22.1 | length 109.5
  Top Layer w0.15: DD9.59@36.75,187.65 36.75,191.008
  Top Layer w0.25: 57.988,129.032 57.988,130 R22.1@58,130
  Top Layer w0.3: 36.75,191.008 38.249,192.507 v1(40.843,192.507) ; 57.988,129.032 59.893,127.127 63.017,127.127 63.906,128.016 63.906,131.267 63.678,131.496 v1(63.678,131.801) 63.678,133.05 DA5.3@63.7,133.05 ; v1(69.012,137.135) 69.012,165.659 v1(71.45,168.097)
  Bottom Layer w0.3: v1(40.843,192.507) 41.351,192.507 42.527,191.331 42.527,189.992 43.052,189.467 62.374,189.467 71.45,180.391 v1(71.45,168.097) ; v1(63.678,131.801) v1(69.012,137.135)
UPR6_2: DA11.3 DD9.35 R36.1 | length 63
  Top Layer w0.15: 42.369,179.629 42.748,179.25 DD9.35@43.65,179.25
  Top Layer w0.25: R36.1@58,142 59.628,142
  Top Layer w0.3: v1(41.046,179.629) 42.369,179.629 ; 59.628,142 62.662,145.034 62.662,145.05 ; v1(61.392,153.391) 61.392,146.304 62.662,145.05 ; DA11.3@63.7,145.05 62.662,145.05
  Bottom Layer w0.3: v1(41.046,179.629) 47.379,179.629 48.417,180.666 55.224,180.666 61.392,174.498 v1(61.392,153.391)
UPR6A_1: DA5.4 R33.2 | length 22.9
  Top Layer w0.3: v1(66.091,132.08) 66.091,133.05 DA5.4@66.3,133.05 ; v1(74.676,147) R33.2@76,147
  Bottom Layer w0.3: v1(66.091,132.08) 69.393,132.08 74.676,137.363 v1(74.676,147)
UPR6A_2: DA11.4 R35.2 | length 35.1
  Top Layer w0.3: DA11.4@66.3,145.05 66.979,145.05 67.249,144.78 67.249,121.422 71.796,116.875 R35.2@76,116.875
VCAP_1: C9.1 DD9.31 | length 4.9
  Top Layer w0.15: C9.1@41.25,172 41.25,172.125 41.11,172.125 41.11,173.965 41.225,173.965 41.225,174.875 41.25,174.875 DD9.31@41.25,176.35
  Top Layer w0.3: C9.1@41,172 C9.1@41.25,172
VCAP_2: C10.1 DD9.47 | length 7.8
  Top Layer w0.15: DD9.47@43.65,185.25 44.534,185.25 44.584,185.3 47.132,185.3
  Top Layer w0.3: 47.132,185.3 48.082,186.25 C10.1@51,186.25
XA1: DA8.1 X5.3 | length 12.2
  Top Layer w0.3: X5.3@10,72 11.515,70.485 16.408,70.485 17.623,71.7 DA8.1@21.05,71.7
XA2: DA14.1 X5.6 | length 12.2
  Top Layer w0.3: X5.6@10,81 11.422,79.578 16.332,79.578 17.754,81 DA14.1@21.05,81
XB1: DA8.3 X5.4 | length 18.1
  Top Layer w0.3: DA8.3@22.95,71.7 22.95,71.12 23.585,70.485 v1(24.181,70.485)
  Bottom Layer w0.3: X5.4@10,75 11.492,73.508 21.158,73.508 v1(24.181,70.485)
XB2: DA14.3 X5.7 | length 16.7
  Top Layer w0.3: v1(20.041,79.781) 22.352,79.781 22.95,80.379 DA14.3@22.95,81
  Bottom Layer w0.3: X5.7@10,84 11.42,85.42 14.402,85.42 v1(20.041,79.781)
XDPR1_1: DA20.1 X4.7 | length 190.3
  Top Layer w0.3: DA20.1@38.05,79.7 38.05,80.29 38.354,80.594 39.497,80.594 v1(39.878,80.975) ; v1(128.486,63.31) 139.192,52.603 139.192,45.288 140.394,44.087 157.234,44.087 163.093,38.227 163.093,29.778 173.517,19.355 187.209,19.355 188.276,18.288 188.276,16.254 X4.7@189.68,14.85
  Bottom Layer w0.3: v1(39.878,80.975) 43.028,77.826 62.814,77.826 77.33,63.31 v1(128.486,63.31)
XDPR1_2: DA24.3 X4.17 | length 172.7
  Top Layer w0.3: v1(39.116,68.986) 39.95,69.82 DA24.3@39.95,71.4 ; v1(128.727,37.871) 137.16,37.871 160.181,14.85 X4.17@186.68,14.85
  Bottom Layer w0.3: v1(39.116,68.986) 63.779,44.323 122.276,44.323 v1(128.727,37.871)
XDPR2_1: DA20.3 X4.8 | length 214.4
  Top Layer w0.3: v1(38.125,77.876) 38.989,77.876 39.95,78.837 DA20.3@39.95,79.7 ; v1(127.813,57.455) 127.813,33.274 138.735,22.352 v1(151.282,22.352)
  Bottom Layer w0.3: v1(38.125,77.876) 42.266,73.736 62.078,73.736 78.359,57.455 v1(127.813,57.455) ; v1(151.282,22.352) 190.576,22.352 191.084,21.844 191.084,20.015 190.5,19.431 186.106,19.431 185.268,18.593 185.268,11.1 185.928,10.439 188.269,10.439 X4.8@189.68,11.85
XDPR2_2: DA27.1 X4.18 | length 229.1
  Top Layer w0.3: DA27.1@38.05,62.4 38.05,57.506 65.024,30.532 65.024,8.915 64.008,7.899 57.391,7.899 56.496,7.004 56.496,3.626 58.953,1.168 v1(62.357,1.168)
  Bottom Layer w0.3: v1(62.357,1.168) 62.814,0.711 188.951,0.711 191.084,2.845 191.084,12.7 190.525,13.259 188.089,13.259 X4.18@186.68,11.85
XDPR3_1: DA24.1 X4.9 | length 181.6
  Top Layer w0.3: v1(37.262,68.428) 38.05,69.216 DA24.1@38.05,71.4 ; v1(111.277,41.834) 145.669,7.442 v1(180.391,7.442)
  Bottom Layer w0.3: v1(37.262,68.428) 63.856,41.834 v1(111.277,41.834) ; v1(180.391,7.442) 188.272,7.442 X4.9@189.68,8.85
XDPR3_2: DA27.3 X4.19 | length 209.2
  Top Layer w0.3: DA27.3@39.95,62.4 39.95,57.531 65.634,31.847 65.634,7.798 64.973,7.137 58.645,7.137 57.096,5.588 57.096,4.118 58.877,2.337 110.896,2.337 114.224,5.664 183.494,5.664 X4.19@186.68,8.85
XKV1: DA30.1 R97.2 X3.1 | length 33.2
  Top Layer w0.25: 17.983,103.5 R97.2@22,103.5
  Top Layer w0.3: X3.1@10,104 11.511,102.489 16.972,102.489 17.983,103.5 ; v1(26.543,104.699) DA30.1@28.05,104.7
  Bottom Layer w0.3: X3.1@10,104 12.222,101.778 23.622,101.778 v1(26.543,104.699)
XKV2: DA30.3 R99.2 X3.2 | length 28.5
  Top Layer w0.25: R99.2@22,108.5 22.386,108.5 24.257,106.629 v1(24.968,105.918)
  Top Layer w0.3: v1(24.257,105.537) 24.257,106.629 ; DA30.3@29.95,104.7 29.95,104.478 30.396,104.478 v1(31.039,103.835)
  Bottom Layer w0.3: X3.2@10,107 11.463,105.537 v1(24.257,105.537) ; v1(24.968,105.918) 28.956,105.918 v1(31.039,103.835)
XKV3: DA31.1 R101.2 X3.3 | length 21.2
  Top Layer w0.25: 18.987,113.5 R101.2@22,113.5 23.166,113.5
  Top Layer w0.3: v1(18.059,112.573) 18.987,113.5 ; 23.166,113.5 25.166,111.5 27.432,111.5 28.05,112.118 DA31.1@28.05,112.7
  Bottom Layer w0.3: X3.3@10,110 11.582,111.582 17.069,111.582 v1(18.059,112.573)
XR1: DA18.1 X5.5 | length 27.6
  Top Layer w0.3: v1(16.459,91.745) 20.32,91.745 21.05,91.015 DA18.1@21.05,90
  Bottom Layer w0.3: X5.5@10,78 8.585,79.415 8.585,90.856 9.144,91.415 16.129,91.415 v1(16.459,91.745)
XR2: DA18.3 X5.8 | length 15.8
  Top Layer w0.3: v1(22.606,91.288) 22.95,90.944 DA18.3@22.95,90
  Bottom Layer w0.3: X5.8@10,87 11.519,88.519 19.837,88.519 v1(22.606,91.288)
pads on no net: DA1.3 DA1.5 DA1.8 DA3.3 DA3.5 DA3.8 DA15.7 DA15.8 DA19.7 DA19.8 DA21.7 DA21.8 DA25.7 DA25.8 DA31.3 DA31.4 DD1.1 DD1.3 DD1.5 DD1.7 DD1.9 DD1.10 DD1.12 DD1.13 DD1.14 DD2.1 DD2.3 DD2.5 DD2.7 DD2.9 DD2.10 DD2.12 DD2.13 DD2.14 DD3.1 DD3.3 DD3.5 DD3.7 DD3.9 DD3.10 DD3.12 DD3.13 DD3.14 DD4.1 DD4.3 DD4.5 DD4.7 DD4.9 DD4.10 DD4.12 DD4.13 DD4.14 DD5.1 DD5.3 DD5.5 DD5.7 DD5.9 DD5.10 DD5.12 DD5.13 DD5.14 DD6.1 DD6.3 DD6.5 DD6.7 DD6.9 DD6.10 DD6.12 DD6.13 DD6.14 DD7.1 DD7.3 DD7.5 DD7.7 DD7.9 DD7.10 DD7.12 DD7.13 DD7.14 DD8.1 DD8.3 DD8.5 DD8.7 DD8.9 DD8.10 DD8.12 DD8.13 DD8.14 DD9.3 DD9.4 DD9.28 DD9.45 DD9.54 DD10.1 DD10.3 DD10.5 DD10.7 DD10.9 DD10.10 DD10.12 DD10.13 DD10.14 DD11.1 DD11.3 DD11.5 DD11.7 DD11.9 DD11.10 DD11.12 DD11.13 DD11.14 DD12.1 DD12.3 DD12.5 DD12.7 DD12.9 DD12.10 DD12.12 DD12.13 DD12.14 DD13.1 DD13.3 DD13.5 DD13.7 DD13.9 DD13.10 DD13.12 DD13.13 DD13.14 X2.A X3.A X4.A X5.A

## Polygon pours and split planes (outlines as drawn)
GND on Top Layer "GND_L01_P001" (solid, pour order 1): 199.5,199.5 73,199.5 73,122 64.5,122 64.5,45.5 17,45.5 17,15 0.5,15 0.5,0.5 199.5,0.5
GNDD on Top Layer "GNDD_L01_P000" (solid, pour order 0): 0.5,199.5 72.5,199.5 72.5,122.5 64,122.5 64,46 16.5,46 16.5,15.5 0.5,15.5

## Silkscreen, mask and mechanical layers (free items; w line width, h text height)
Mechanical 1:
  the board outline again, w0.254

## Text inside footprints (layer, text, board x,y; h text height)
C16: Top Overlay "+" at 6.529,9.529 h1.1
C17: Top Overlay "+" at 14.221,36.721 h1.1 r180
C20: Top Overlay "+" at 105.471,4.471 h1.1 r180
C21: Top Overlay "+" at 95.029,30.029 h1.1
C31: Top Overlay "+" at 74.471,29.079 h1.1 r90
C32: Top Overlay "+" at 72.471,4.529 h1.1 r90
C33: Top Overlay "+" at 40.471,23.529 h1.1 r90
C34: Top Overlay "+" at 46.471,5.529 h1.1 r90